# EAGLE board 8bitbig-bacon_home-front_pcb (EAGLE 9.2.2)
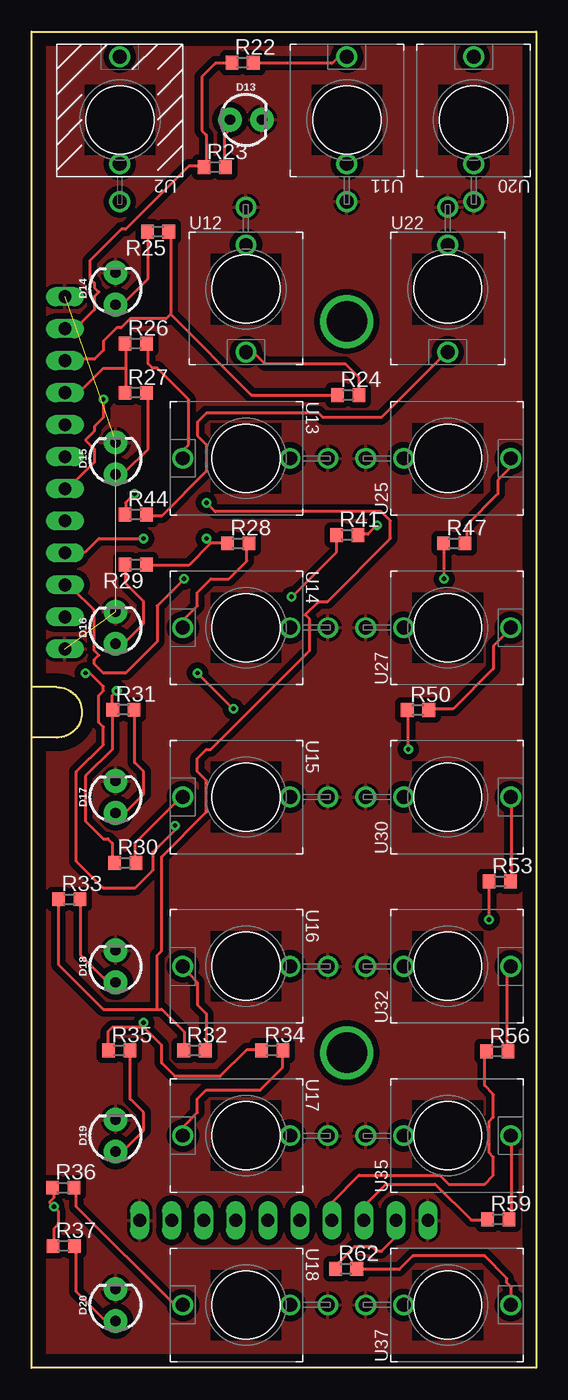
[diagram p0: board, top side]
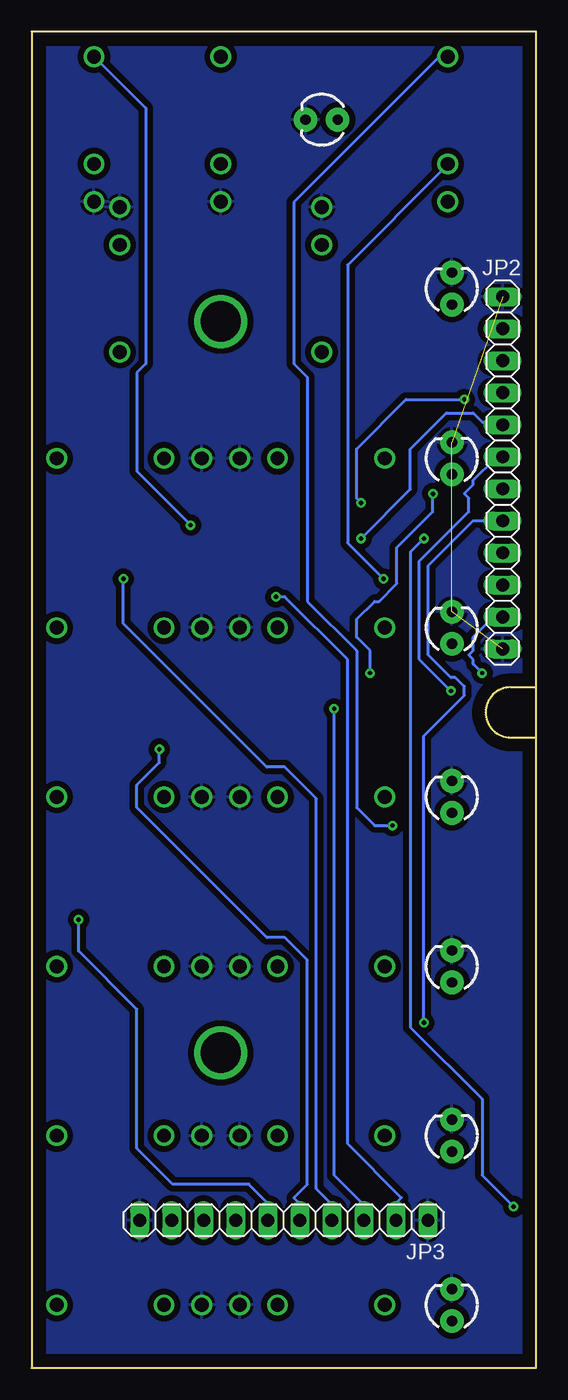
[diagram p1: board, bottom side, seen from below]

Size 40 x 106 mm. Coordinates in mm from the lower left corner, seen from the top.
Outline: 0,0 0,106 40,106 40,0 0,0
Copper layers (1*16): Top 0.035mm / dielectric 1.5mm / Bottom 0.035mm
Design rules "default": minimum track width 6mil, minimum drill 0.35mm, track to track 6mil, track to pad 6mil, pad to pad 6mil, via to via 6mil, smd to smd 6mil, copper to edge 40mil, drill to drill 6mil, minimum pad ring 10mil, minimum via ring 8mil, stop-mask expansion 4mil, vias tented up to drill 0mil, thermal gap 10mil
Net classes: 0 default: width 0.254 mm, drill 0.254 mm, clearance 0.457 mm

## Footprints (pad centres in the part's own frame; a part is rotated, then mirrored left to right if it is on the bottom)
LED_3MM = drill 0.813 pad 1.88: A -1.27,0; K 1.27,0
1X12 = drill 1.016 long: 1 -13.97,0; 2 -11.43,0; 3 -8.89,0; 4 -6.35,0; 5 -3.81,0; 6 -1.27,0; 7 1.27,0; 8 3.81,0; 9 6.35,0; 10 8.89,0; 11 11.43,0; 12 13.97,0
1X10 = drill 1.016 long: 1 -11.43,0; 2 -8.89,0; 3 -6.35,0; 4 -3.81,0; 5 -1.27,0; 6 1.27,0; 7 3.81,0; 8 6.35,0; 9 8.89,0; 10 11.43,0
R0603 = smd 1 x 1.1: 1 -0.85,0; 2 0.85,0
WQP-PJ366ST_JACK = drill 1.1: P$1_TIP 0,5; P$2_SWITCH 0,-3.5; P$3_SLEEVE 0,-6.5
WQP-PJ301M-12_JACK = drill 1.1: P$1_TIP 0,5; P$2_SWITCH 0,-3.5; P$3_SLEEVE 0,-6.5

## Placement (x,y rotation side)
D13  [LED_3MM]  17,99 0 top
D14  [LED_3MM]  6.67,85.61 90 top
D15  [LED_3MM]  6.67,72.14 90 top
D16  [LED_3MM]  6.67,58.71 90 top
D17  [LED_3MM]  6.67,45.29 90 top
D18  [LED_3MM]  6.67,31.86 90 top
D19  [LED_3MM]  6.67,18.43 90 top
D20  [LED_3MM]  6.67,5 90 top
JP2  [1X12]  2.65,71 270 bottom
JP3  [1X10]  20,11.71 180 bottom
R22  1k  [R0603]  16.73,103.53 0 top
R23  1k  [R0603]  14.52,95.23 0 top
R24  1k  [R0603]  25.11,77.17 0 top
R25  1k  [R0603]  10.03,90.13 180 top
R26  1k  [R0603]  8.26,81.25 0 top
R27  1k  [R0603]  8.26,77.34 0 top
R28  1k  [R0603]  16.38,65.41 0 top
R29  1k  [R0603]  8.26,63.74 180 top
R30  1k  [R0603]  7.43,40.07 0 top
R31  1k  [R0603]  7.29,52.21 0 top
R32  1k  [R0603]  12.92,25.18 0 top
R33  1k  [R0603]  3,37.18 0 top
R34  1k  [R0603]  19.08,25.18 0 top
R35  1k  [R0603]  6.95,25.18 0 top
R36  1k  [R0603]  2.51,14.31 0 top
R37  1k  [R0603]  2.54,9.67 0 top
R41  1k  [R0603]  25.02,66.07 0 top
R44  1k  [R0603]  8.26,67.69 0 top
R47  1k  [R0603]  33.51,65.41 0 top
R50  1k  [R0603]  30.64,52.18 0 top
R53  1k  [R0603]  37.13,38.59 0 top
R56  1k  [R0603]  36.92,25.1 0 top
R59  1k  [R0603]  37,11.79 0 top
R62  1k  [R0603]  24.94,7.85 0 top
U2  THONKI-STEREO  [WQP-PJ366ST_JACK]  7,99 0 top
U11  THONKICONNNEW  [WQP-PJ301M-12_JACK]  25,99 0 top
U12  THONKICONNNEW  [WQP-PJ301M-12_JACK]  17,85.57 180 top
U13  THONKICONNNEW  [WQP-PJ301M-12_JACK]  17,72.14 90 top
U14  THONKICONNNEW  [WQP-PJ301M-12_JACK]  17,58.71 90 top
U15  THONKICONNNEW  [WQP-PJ301M-12_JACK]  17,45.29 90 top
U16  THONKICONNNEW  [WQP-PJ301M-12_JACK]  17,31.86 90 top
U17  THONKICONNNEW  [WQP-PJ301M-12_JACK]  17,18.43 90 top
U18  THONKICONNNEW  [WQP-PJ301M-12_JACK]  17,5 90 top
U20  THONKICONNNEW  [WQP-PJ301M-12_JACK]  35.05,99 0 top
U22  THONKICONNNEW  [WQP-PJ301M-12_JACK]  33,85.57 180 top
U25  THONKICONNNEW  [WQP-PJ301M-12_JACK]  33,72.14 270 top
U27  THONKICONNNEW  [WQP-PJ301M-12_JACK]  33,58.71 270 top
U30  THONKICONNNEW  [WQP-PJ301M-12_JACK]  33,45.29 270 top
U32  THONKICONNNEW  [WQP-PJ301M-12_JACK]  33,31.86 270 top
U35  THONKICONNNEW  [WQP-PJ301M-12_JACK]  33,18.43 270 top
U37  THONKICONNNEW  [WQP-PJ301M-12_JACK]  33,5 270 top
U$1  [PANEL_CABLE_CUTOUT]  0,52 0 top

## Library data of the parts
D13-D20 = SparkFun-LED; PROD_ID: DIO-08794
JP2 JP3 = pinhead
R22-R37 R41 R44 R47 R50 R53 R56 R59 R62 = resistor
U2 U11-U18 U20 U22 U25 U27 U30 U32 U35 U37 = MusicThingModular
U$1 = SchnitzelsComponents

## Nets
CV1: JP3.2 R41.1
CV2: JP3.3 R44.1
CV3: JP3.4 R47.1
CV4: JP3.5 R50.1
CV5: JP3.6 R53.1
CV6: JP3.7 R56.1
CV7: JP3.8 R59.1
CV8: JP3.9 R62.1
GATE9: JP2.2 R22.1 R23.1
GATE10: JP2.3 R24.1 R25.1
GATE11: JP2.4 R26.1 R27.1
GATE12: JP2.5 R28.1 R29.1
GATE13: JP2.6 R30.1 R31.1
GATE14: JP2.7 R32.1 R33.1
GATE15: JP2.8 R34.1 R35.1
GATE16: JP2.9 R36.1 R37.1
GND: D13.K D14.K D15.K D16.K D17.K D18.K D19.K D20.K JP2.1 JP2.12 JP3.1 JP3.10 U11.P$3_SLEEVE U12.P$3_SLEEVE U13.P$3_SLEEVE U14.P$3_SLEEVE U15.P$3_SLEEVE U16.P$3_SLEEVE U17.P$3_SLEEVE U18.P$3_SLEEVE U20.P$3_SLEEVE U22.P$3_SLEEVE U25.P$3_SLEEVE U27.P$3_SLEEVE U30.P$3_SLEEVE U32.P$3_SLEEVE U35.P$3_SLEEVE U37.P$3_SLEEVE
N$1: JP2.11 U2.P$1_TIP
N$3: JP2.10 U2.P$2_SWITCH
N$34: R22.2 U11.P$1_TIP
N$35: D13.A R23.2
N$36: R24.2 U12.P$1_TIP
N$37: D14.A R25.2
N$38: R26.2 U13.P$1_TIP
N$39: D15.A R27.2
N$40: R28.2 U14.P$1_TIP
N$41: D16.A R29.2
N$42: R30.2 U15.P$1_TIP
N$43: D17.A R31.2
N$44: R32.2 U16.P$1_TIP
N$45: D18.A R33.2
N$46: R34.2 U17.P$1_TIP
N$47: D19.A R35.2
N$48: R36.2 U18.P$1_TIP
N$49: D20.A R37.2
N$51: R41.2 U20.P$1_TIP
N$54: R44.2 U22.P$1_TIP
N$57: R47.2 U25.P$1_TIP
N$60: R50.2 U27.P$1_TIP
N$63: R53.2 U30.P$1_TIP
N$66: R56.2 U32.P$1_TIP
N$69: R59.2 U35.P$1_TIP
N$72: R62.2 U37.P$1_TIP

## Tracks (layer width: path | path; a pad name or v marks a point on that pad's centre or on a via)
CV1  (via drill 0.35)
  Top 0.254: v20.62,61.16 24.18,64.72 24.18,65.79 R41.1
  Bottom 0.254: v20.62,61.16 19.91,61.16 14.94,56.19 14.94,17.78 10.67,13.51 11.02,13.16 11.02,11.73 JP3.2
CV2  (via drill 0.35)
  Top 0.254: v8.18,69.34 7.47,68.63 7.47,67.92 R44.1 | v16,52.27 v13.16,55.12
  Bottom 0.254: v8.18,69.34 8.18,67.92 11.02,65.08 11.02,62.23 12.45,60.81 12.8,60.81 14.22,59.38 14.22,57.96 13.16,56.9 v13.16,55.12 | v16,52.27 16,15.29 13.87,13.16 13.87,11.73 JP3.3
CV3  (via drill 0.35)
  Top 0.254: v32.72,62.59 32.72,65.08 R47.1
  Bottom 0.254: v32.72,62.59 32.72,59.03 21.34,47.65 19.91,47.65 17.42,45.16 17.42,14.22 16.36,13.16 16.36,11.73 JP3.4
CV4  (via drill 0.35)
  Top 0.254: v29.87,49.07 29.87,51.92 R50.1
  Bottom 0.254: v29.87,49.07 29.87,48.01 31.65,46.23 31.65,44.45 21.34,34.14 19.91,34.14 18.14,32.36 18.14,14.58 19.2,13.51 18.85,13.16 18.85,11.73 JP3.5
CV5  (via drill 0.35)
  Top 0.254: v36.27,35.56 36.27,38.41 R53.1
  Bottom 0.254: v36.27,35.56 36.27,33.07 31.65,28.45 31.65,17.42 28.8,14.58 22.76,14.58 21.34,13.16 21.34,11.73 JP3.6
CV6
  Top 0.254: R56.1 35.92,24.89 35.92,22.4 36.63,21.69 36.63,19.91 36.27,19.56 36.27,17.07 36.63,16.71 36.63,15.29 35.92,14.58 33.07,14.58 32.36,15.29 25.96,15.29 23.82,13.16 23.82,11.73 JP3.7
CV7
  Top 0.254: R59.1 35.92,11.73 34.85,11.73 32,14.58 28.09,14.58 26.67,13.16 26.67,11.73 JP3.8
CV8
  Top 0.254: R62.1 24.18,8.18 25.6,9.6 27.03,9.6 27.38,9.25 27.74,9.25 28.8,10.31 28.8,11.38 JP3.9
GATE9
  Top 0.254: R22.1 15.65,103.48 14.58,103.48 13.51,102.41 13.51,98.15 13.87,97.79 13.87,95.3 R23.1 13.51,95.3 12.45,95.3 7.47,90.32 7.11,90.32 4.62,87.83 4.62,86.41 4.98,86.06 4.98,85.7 5.33,85.34 4.98,84.99 4.98,83.92 3.56,82.5 2.85,82.5 JP2.2
GATE10
  Top 0.254: 11.02,83.57 17.42,77.17 24.18,77.17 R24.1 | 11.02,83.57 11.02,89.97 R25.1 | 11.02,83.57 10.67,83.21 7.82,83.21 7.11,82.5 6.76,82.5 5.69,81.43 5.69,80.72 4.98,80.01 2.85,80.01 JP2.3
GATE11
  Top 0.254: 7.47,79.3 7.47,81.08 R26.1 | 7.47,79.3 7.47,77.52 R27.1 | 7.47,79.3 5.69,79.3 3.91,77.52 2.85,77.52 JP2.4
GATE12  (via drill 0.35)
  Top 0.254: 14.22,65.43 12.45,63.65 9.25,63.65 R29.1 | 14.22,65.43 15.29,65.43 R28.1 | 14.22,65.43 v13.87,65.79
  Bottom 0.254: v13.87,65.79 9.96,69.7 9.96,72.9 7.11,75.74 4.98,75.74 4.27,75.03 2.85,75.03 JP2.5
GATE13  (via drill 0.35)
  Top 0.254: R30.1 6.4,40.18 6.4,41.6 6.04,41.96 5.69,41.96 4.27,43.38 4.27,46.94 6.4,49.07 6.4,51.92 R31.1 6.4,52.27 6.4,53.34 v6.76,53.7
  Bottom 0.254: v6.76,53.7 9.25,56.19 9.25,64.01 5.33,67.92 5.33,68.99 5.69,69.34 4.98,70.05 4.98,70.41 3.2,72.19 2.85,72.19 JP2.6
GATE14  (via drill 0.35)
  Top 0.254: 9.96,28.45 5.69,28.45 2.13,32 2.13,36.98 R33.1 | 9.96,28.45 10.31,28.45 12.09,26.67 12.09,25.25 R32.1 | v5.69,76.81 5.69,75.39 4.98,74.68 4.98,74.32 4.27,73.61 4.98,72.9 4.98,71.83 3.2,70.05 2.85,70.05 JP2.7 | v13.87,68.63 14.58,67.92 27.74,67.92 28.45,67.21 28.45,65.79 23.47,60.81 22.76,60.81 21.69,59.74 22.05,59.38 22.05,56.9 14.22,49.07 13.87,49.07 13.16,48.36 13.16,47.3 13.87,46.58 13.87,44.09 10.31,40.54 10.31,33.07 9.96,32.72 9.96,28.45
  Bottom 0.254: v5.69,76.81 10.31,76.81 14.22,72.9 14.22,68.99 v13.87,68.63
GATE15  (via drill 0.35)
  Top 0.254: 8.89,27.03 6.4,27.03 6.04,26.67 6.04,25.25 R35.1 | 8.89,27.03 10.31,25.6 10.31,24.18 11.38,23.11 14.94,23.11 17.07,25.25 18.14,25.25 R34.1 | 8.89,27.03 v8.89,27.38
  Bottom 0.254: v8.89,27.38 8.89,50.14 5.69,53.34 5.69,54.05 6.4,54.76 6.76,54.76 8.53,56.54 8.53,63.65 4.98,67.21 2.85,67.21 JP2.8
GATE16  (via drill 0.35)
  Top 0.254: R37.1 1.78,9.96 1.78,11.02 2.13,11.38 2.13,12.45 v1.78,12.8 1.42,13.16 1.78,13.51 1.78,14.22 R36.1 | v8.89,65.79 5.33,65.79 4.27,64.72 2.85,64.72 JP2.9
  Bottom 0.254: v1.78,12.8 4.27,15.29 4.27,21.34 9.96,27.03 9.96,64.72 v8.89,65.79
GND  (3 unrouted)
  pour Top: 1,105 39,105 39,1 1,1
  pour Bottom: 1,105 39,105 39,1 1,1
MOUNTINGHOLE1  (via drill 3.2)
  other vias: 25,83
MOUNTINGHOLE2  (via drill 3.2)
  other vias: 25,25
N$1  (via drill 0.35)
  Top 0.254: v4.27,55.12 4.62,55.12 5.69,54.05 5.69,53.7 5.33,53.34 5.33,51.21 5.69,50.85 5.69,49.43 3.56,47.3 3.56,40.18 5.69,38.05 8.18,38.05 9.6,39.47 9.6,40.89 11.38,42.67 v11.38,43.03
  Bottom 0.254: v4.27,55.12 4.98,55.83 4.98,56.19 5.33,56.54 4.98,56.9 4.98,57.96 3.56,59.38 2.85,59.38 JP2.11 | v11.38,43.03 12.8,43.03 14.22,44.45 14.22,56.9 18.14,60.81 18.14,78.59 19.2,79.65 19.2,92.46 7.82,103.83 7.11,103.83 U2.P$1_TIP
N$3  (via drill 0.35)
  Top 0.254: v12.09,62.59 9.96,60.45 9.96,57.61 7.47,55.12 5.69,55.12 4.98,55.83 4.98,56.19 5.33,56.54 4.98,56.9 4.98,60.1 3.2,61.87 2.85,61.87 JP2.10
  Bottom 0.254: v12.09,62.59 14.94,65.43 14.94,87.48 7.47,94.94 7.11,94.94 6.76,95.3 U2.P$2_SWITCH
N$34
  Top 0.254: R22.2 17.78,103.48 23.82,103.48 24.18,103.83 24.89,103.83 U11.P$1_TIP
N$35
  Top 0.254: R23.2 15.29,95.3 15.29,97.79 15.65,98.15 15.65,98.86 D13.A
N$36
  Top 0.254: R24.2 25.96,77.52 25.96,78.59 24.89,79.65 18.49,79.65 17.78,80.37 17.07,80.37 U12.P$1_TIP
N$37
  Top 0.254: R25.2 9.25,89.97 9.25,86.41 7.47,84.63 6.76,84.63 D14.A
N$38
  Top 0.254: R26.2 9.25,81.08 9.25,79.65 9.6,79.3 9.96,79.3 12.45,76.81 12.45,73.25 12.09,72.9 12.09,72.19 U13.P$1_TIP
N$39
  Top 0.254: R27.2 9.25,77.17 9.25,72.9 7.47,71.12 6.76,71.12 D15.A
N$40
  Top 0.254: R28.2 17.07,65.08 17.07,64.01 15.65,62.59 14.22,62.59 13.16,61.52 13.16,60.45 11.73,59.03 U14.P$1_TIP
N$41
  Top 0.254: R29.2 7.47,63.65 7.47,62.23 8.89,60.81 8.89,59.03 7.47,57.61 6.76,57.61 D16.A
N$42
  Top 0.254: R30.2 8.18,40.18 8.18,41.6 11.38,44.81 11.38,45.16 11.73,45.52 U15.P$1_TIP
N$43
  Top 0.254: R31.2 8.18,51.92 8.18,48.01 8.89,47.3 8.89,45.52 7.47,44.09 6.76,44.09 D17.A
N$44
  Top 0.254: R32.2 13.87,25.25 13.87,28.09 13.16,28.8 13.16,30.58 12.45,31.29 12.09,31.29 11.73,31.65 U16.P$1_TIP
N$45
  Top 0.254: R33.2 3.91,36.98 3.91,32.72 5.69,30.94 6.4,30.94 D18.A
N$46
  Top 0.254: R34.2 19.91,24.89 19.91,23.82 18.14,22.05 13.87,22.05 13.16,21.34 13.16,20.27 12.09,19.2 12.09,18.49 U17.P$1_TIP
N$47
  Top 0.254: R35.2 7.82,24.89 7.82,21.34 8.89,20.27 8.89,18.85 7.47,17.42 6.76,17.42 D19.A
N$48
  Top 0.254: R36.2 3.56,14.22 3.56,12.8 11.38,4.98 11.73,4.98 U18.P$1_TIP
N$49
  Top 0.254: R37.2 3.56,9.6 3.56,6.04 5.69,3.91 6.4,3.91 D20.A
N$51  (via drill 0.35)
  Top 0.254: v27.38,66.85 26.67,66.14 25.96,66.14 R41.2
  Bottom 0.254: v27.38,66.85 31.65,71.12 31.65,78.94 30.94,79.65 30.94,99.92 34.49,103.48 34.49,103.83 34.85,104.19 U20.P$1_TIP
N$54
  Top 0.254: R44.2 9.25,67.56 10.31,67.56 13.87,71.12 13.87,73.25 13.16,73.97 13.16,75.03 13.87,75.74 22.76,75.74 23.11,75.39 27.74,75.39 32.36,80.01 32.36,80.37 32.72,80.72 U22.P$1_TIP
N$57
  Top 0.254: R47.2 34.49,65.43 34.49,66.85 36.98,69.34 36.98,70.41 38.05,71.48 38.05,71.83 U25.P$1_TIP
N$60
  Top 0.254: R50.2 31.65,52.27 33.43,52.27 36.63,55.47 36.63,57.25 38.05,58.67 U27.P$1_TIP
N$63
  Top 0.254: R53.2 38.05,38.76 38.05,45.16 U30.P$1_TIP
N$66
  Top 0.254: R56.2 37.69,25.25 37.69,31.65 U32.P$1_TIP
N$69
  Top 0.254: R59.2 38.05,12.09 38.05,18.14 U35.P$1_TIP
N$72
  Top 0.254: R62.2 25.96,7.82 29.16,7.82 30.23,8.89 35.92,8.89 37.69,7.11 37.69,6.76 38.05,6.4 38.05,5.33 U37.P$1_TIP